# Altium PCB Copy of DAP-PCB.PcbDoc (part 4 of 5)
Units mm, origin at the board's own origin, x right, y up, seen from the top; angles counter-clockwise.
Board outline 63 x 53 mm, 6 copper layers (Top Layer (Sig), L2 (GND), L3 (Sig), L4 (Sig), L5 (GND), Bottom Layer (Sig)), stack 0.87 mm thick; 262 components, 167 nets, 874 pads, 298 vias.
Unrouted connection lines stored in the file: 134.
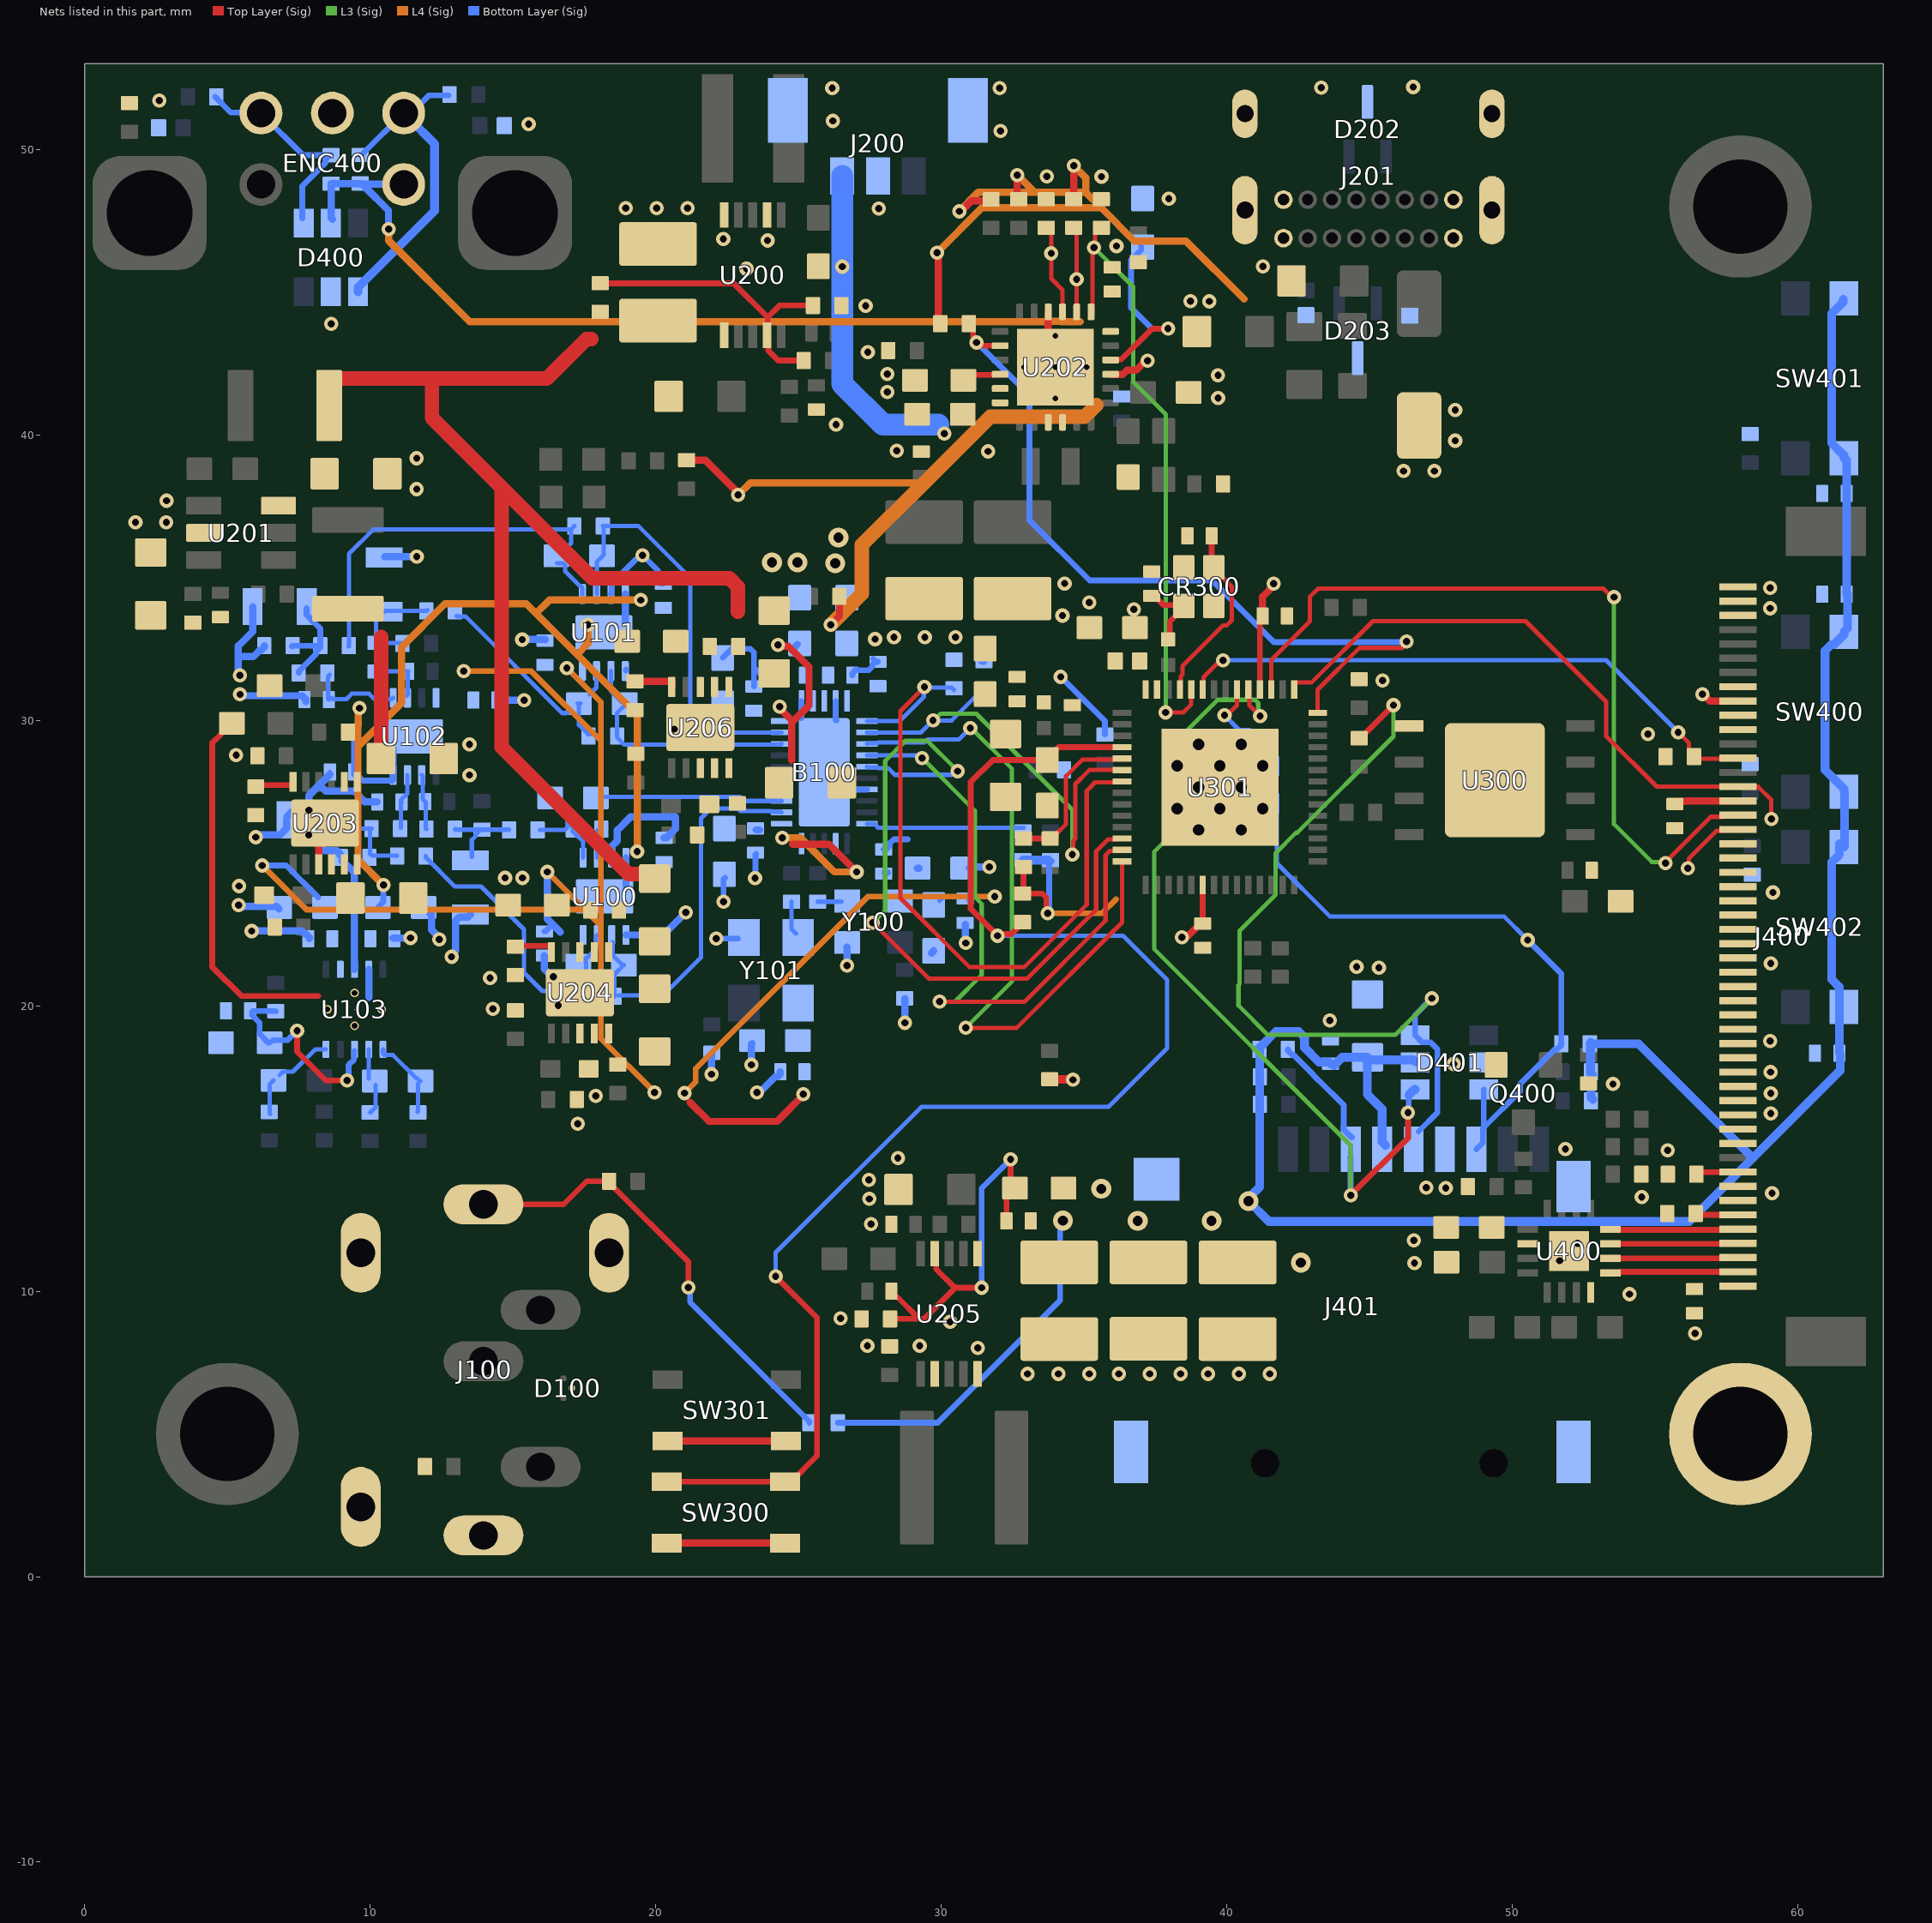
[diagram p6: the nets of this part, all layers, seen from the top]

## Via types
v1: diameter 0.5, hole 0.25, Top Layer (Sig) to Bottom Layer (Sig), tented both sides, 270 vias
v2: diameter 0.7, hole 0.35, Top Layer (Sig) to Bottom Layer (Sig), tented both sides, 17 vias
v3: diameter 1.25, hole 0.75, Top Layer (Sig) to Bottom Layer (Sig), 6 vias
v4: diameter 0.4/0.4/0.4/0.4/0.4/0.4 (per signal layer), hole 0.2, Top Layer (Sig) to Bottom Layer (Sig), tented both sides, 5 vias

## Nets (pads, with @x,y where several pads share a name; then routed paths per layer and width w, separated by ;. In a path a pad name is that pad's centre, name@x,y a point inside that pad or via, vN(x,y) a via of type N, cw(c..) or ccw(c..) an arc to the next point about the centre after c; other vN are vias at no path point) (continued)
GND: (continued)
  other v1: 33.028,7.105 34.108,7.105 35.187,7.105 36.229,7.105 37.308,7.105 38.388,7.105 39.353,7.105 40.432,7.105 41.512,7.105 31.28,8.01 27.419,8.086 29.248,8.086 56.414,8.522 30.315,8.925 26.48,9.052 54.111,9.897 46.583,10.987 51.663,11.069 52.298,11.679 46.558,11.786 27.546,12.354 27.483,13.233 54.54,13.302 46.989,13.629 47.676,13.614 27.47,13.903 28.486,14.665 55.448,14.935 51.867,14.978 17.27,15.871 59.061,16.223 17.907,16.844 59.061,16.934 53.534,17.258 59.055,17.678 47.956,17.962 59.036,18.763 43.612,19.482 14.304,19.887 16.591,20.012 14.2,20.977 45.332,21.332 44.552,21.361 59.061,21.481 21.057,23.266 59.138,23.97 5.406,24.192 14.726,24.481 15.336,24.481 23.482,24.475 5.994,25.908 13.479,28.082 5.309,28.778 13.479,29.161 54.762,29.515 20.65,29.693 15.392,30.709 45.462,31.4 5.436,31.572 27.688,32.846 28.349,32.91 29.429,32.91 30.508,32.91 34.25,33.669 59.036,33.927 35.188,34.134 59.036,34.638 34.328,34.795 11.633,35.738 1.781,36.934 2.86,36.934 2.87,37.694 11.631,38.103 46.195,38.734 47.274,38.734 11.631,39.182 28.448,39.446 48.005,39.797 26.319,40.364 48.005,40.876 39.701,41.293 28.112,41.503 39.7,42.088 28.112,42.138 27.432,42.901 8.636,43.891 27.356,44.526 38.735,44.683 39.395,44.679 23.184,45.821 41.275,45.905 36.144,46.617 23.921,46.812 22.372,46.862 18.957,47.949 20.036,47.949 21.116,47.949 27.813,47.93 37.977,48.279 33.706,49.055 35.617,49.05 32.08,50.648 15.552,50.894 26.213,51.003 2.616,51.714 26.187,52.146 32.055,52.146 43.311,52.165 46.537,52.19
  other v2: 26.293,35.502 24.079,35.535 24.968,35.535 26.401,36.405
  other v4: 34.003,41.275 32.903,42.375 34.003,42.375 35.103,42.375 34.003,43.475
GPIO1_DAC: B100.17 R112.2 U301.6 | length 17
  Top Layer (Sig) w0.152: v1(34.596,25.298) 34.629,25.331 34.629,25.777 34.705,25.853 34.705,27.771 35.193,28.259 U301.6@36.339,28.259
  L3 (Sig) w0.152: v1(29.718,29.997) 29.747,29.997 29.981,30.232 31.232,30.232 34.596,26.868 v1(34.596,25.298)
  Bottom Layer (Sig) w0.152: B100.17@27.408,29.576 29.297,29.576 v1(29.718,29.997) 30.371,29.997 31.438,31.064 R112.2@31.471,31.064
GPIO2_DAC: B100.16 R113.2 U301.7 | length 25.2
  Top Layer (Sig) w0.152: v1@29.362,31.115 28.572,30.325 28.572,23.776 30.986,21.361 32.918,21.361 35.1,23.543 35.1,27.531 35.395,27.825 36.306,27.825 U301.7@36.339,27.859
  Bottom Layer (Sig) w0.152: B100.16@27.408,29.976 28.554,29.976 29.392,30.815 29.392,31.145 v1(29.413,31.166) 29.435,31.144 30.374,31.144 R113.2@30.455,31.064
ILIM_BQ: R217.2 U202.22 | length 6.4
  Top Layer (Sig) w0.203: U202.22@35.938,42.625 35.956,42.643 36.311,42.643 37.389,43.721 v1(37.948,43.721)
  Bottom Layer (Sig) w0.203: R217.2@37.008,46.617 37.008,46.479 36.656,46.127 36.656,44.454 37.389,43.721 v1(37.948,43.721)
ILIM_DAC_LDO+: R246.2 U206.5 | length 1.5
  Top Layer (Sig) w0.254: R246.2@19.279,31.364 20.574,31.364 U206.5@20.574,31.191
ILIM_LDO+: R229.2 U204.5 | length 1.5
  Top Layer (Sig) w0.203: R229.2@15.062,22.098 16.351,22.098 U204.5@16.351,21.88
ILIM_LDO-: R230.2 U203.6 | length 1.4
  Top Layer (Sig) w0.203: R230.2@5.994,27.729 7.274,27.729 7.29,27.745 U203.6@7.29,27.813
IM0: J400.6 R402.2 | length 1.4
  Top Layer (Sig) w0.203: R402.2@56.431,12.725 56.482,12.675 J400.6@57.81,12.675
IM3: J400.9 R403.2 | length 0.9
  Top Layer (Sig) w0.203: R403.2@56.456,14.097 56.532,14.173 J400.9@57.302,14.173
INT_BQ: R210.1 U202.8 U301.42 | length 28.1
  Top Layer (Sig) w0.152: U301.42@43.189,30.259 43.189,31.074 44.653,32.537 46.152,32.537 v1@46.228,32.614
  Top Layer (Sig) w0.203: R210.1@30.972,43.899 31.12,43.75 31.12,43.44 31.242,43.319 v1(31.242,43.238) 31.322,43.238 31.436,43.125 32.041,43.125 U202.8@32.055,43.111
  Bottom Layer (Sig) w0.203: v1(31.242,43.238) 33.096,41.384 33.096,37.008 35.204,34.9 39.497,34.9 41.656,32.741 v1@46.279,32.741
  other v1: 46.304,32.766
ISET_BQ: R218.2 U202.10 | length 1.4
  Top Layer (Sig) w0.203: R218.2@30.783,41.914 30.975,42.106 32.066,42.106 U202.10@32.08,42.121
IV_L: C107.1 R103.2 R116.1 U101.7 | length 7.5
  Bottom Layer (Sig) w0.152: R116.1@13.03,33.655 13.04,33.645 13.335,33.645 16.725,30.255 16.851,30.255 16.862,30.265 C107.1@16.94,30.265 ; C107.1@17.264,30.589 C107.1@17.314,30.589 ; C107.1@17.364,30.589 C107.1@17.314,30.589 ; C107.1@17.688,30.913 17.926,31.15 17.926,31.591 U101.7@17.932,31.598 ; R103.2@17.704,29.515 17.634,29.515 17.314,29.834 C107.1@17.314,30.589
IV_LB: C101.1 R101.2 R123.1 U101.1 | length 13.9
  Bottom Layer (Sig) w0.152: R123.1@9.246,32.588 9.255,32.598 9.255,35.831 10.109,36.685 R101.2@17.034,36.685 ; C101.1@16.547,35.509 16.758,35.509 16.828,35.439 16.828,35.228 17.354,34.702 17.387,34.702 17.436,34.653 U101.1@17.436,34.428 ; C101.1@16.835,36.002 16.835,36.026 16.897,36.087 16.921,36.087 17.034,36.2 R101.2@17.034,36.685 ; R101.2@17.153,36.805 R101.2@17.034,36.685
IV_R: C100.1 R100.2 R121.1 U100.1 | length 3.6
  Bottom Layer (Sig) w0.152: R121.1@15.952,26.163 16.821,26.163 R100.2@16.904,26.246 ; C100.1@16.307,27.28 16.357,27.28 16.928,26.708 16.928,26.404 R100.2@17.12,26.213 ; R100.2@17.094,26.187 17.094,26.105 17.278,25.922 17.301,25.922 17.462,25.761 U100.1@17.462,25.183
IV_RB: C106.1 R102.2 R131.1 U100.7 | length 10.8
  Bottom Layer (Sig) w0.152: R131.1@11.947,25.247 11.947,25.197 12.964,24.181 13.886,24.181 15.391,22.676 15.391,21.159 16.035,20.516 17.385,20.516 17.501,20.401 R102.2@17.501,20.374 ; C106.1@17.475,21.615 17.559,21.531 R102.2@17.559,20.328 ; C106.1@17.551,21.666 17.584,21.666 17.913,21.995 17.913,22.434 U100.7@17.962,22.483
JACK_DET: J100.4 R118.1 R119.2 | length 16.1
  Top Layer (Sig) w0.203: J100.4@13.97,13.044 16.778,13.044 17.588,13.854 R119.2@18.37,13.854 18.37,13.804 21.15,11.024 v1(21.15,10.13)
  Bottom Layer (Sig) w0.203: v1(21.15,10.13) 21.207,10.074 21.207,9.618 25.383,5.442 R118.1@25.383,5.392
LDO_BQ: C214.2 R214.2 U202.24
LED1: J400.2 U400.13 | length 4.4
  Top Layer (Sig) w0.203: U400.13@53.442,10.643 53.465,10.666 53.802,10.666 53.813,10.677 J400.2@57.844,10.677
LED2: J400.3 U400.14 | length 4.4
  Top Layer (Sig) w0.203: U400.14@53.442,11.151 57.361,11.151 57.386,11.176 J400.3@57.81,11.176
LED3: J400.4 U400.15 | length 4.4
  Top Layer (Sig) w0.203: U400.15@53.442,11.659 57.734,11.659 J400.4@57.785,11.709
LED4: J400.5 U400.16 | length 4.5
  Top Layer (Sig) w0.203: U400.16@53.442,12.167 53.462,12.146 57.356,12.146 57.377,12.167 J400.5@57.963,12.167
LEFT_EAR: C138.1 R127.1 U103.7 | length 2.1
  Bottom Layer (Sig) w0.152: U103.7@9.954,18.475 9.954,17.453 C138.1@9.957,17.45 ; R127.1@9.997,16.263 10.011,16.263 10.185,16.437 C138.1@10.185,17.221
MISO_LCD: J400.33 | length 2.1
  Top Layer (Sig) w0.152: v1(56.159,24.816) 56.188,24.845 56.188,25.159 57.162,26.133 57.502,26.133 J400.33@57.556,26.187
MOSI_LCD: J400.34 U301.45 | length 27.8
  Top Layer (Sig) w0.152: U301.45@41.564,31.084 41.564,32.116 42.921,33.472 42.921,34.336 43.205,34.62 53.199,34.62 53.504,34.315 v1(53.569,34.315) ; v1(55.372,24.994) 55.372,25.033 56.959,26.619 J400.34@57.404,26.619
  L3 (Sig) w0.152: v1(53.569,34.315) 53.569,26.365 54.893,25.04 55.325,25.04 v1(55.372,24.994)
NetC118_2: C118.2 R122.2 U102.2 | length 2
  Bottom Layer (Sig) w0.152: U102.2@11.807,28.086 11.848,28.046 11.848,27.231 C118.2@11.926,27.152 ; C118.2@11.913,27.153 11.949,27.116 11.949,26.21 R122.2@11.971,26.187
NetC123_2: C123.2 R120.2 U102.6 | length 2
  Bottom Layer (Sig) w0.152: R120.2@10.211,31.715 C123.2@11.287,31.715 ; U102.6@11.278,30.861 11.321,30.904 11.321,31.71 C123.2@11.335,31.724
NetC124_2: C124.2 R117.1 U103.10 | length 3.2
  Bottom Layer (Sig) w0.152: R117.1@6.502,16.205 6.476,16.231 6.476,17.246 C124.2@6.618,17.388 ; C124.2@6.833,17.577 6.945,17.689 7.296,17.689 8.082,18.475 U103.10@8.454,18.475
NetC127_2: C127.2 R115.1 R116.2 R120.1 | length 3.7
  Bottom Layer (Sig) w0.152: C127.2@10.389,33.782 10.211,33.604 R120.1@10.211,32.715 11.151,32.715 R115.1@11.176,32.69 ; C127.2@10.49,33.807 10.516,33.833 11.989,33.833 R116.2@12.014,33.858
NetC130_2: C130.2 R114.1 R121.2 R122.1 | length 2.9
  Bottom Layer (Sig) w0.152: R122.1@12.971,26.187 12.989,26.17 13.825,26.17 R114.1@13.843,26.187 ; C130.2@13.564,25.222 13.564,25.814 13.695,25.946 13.695,25.996 R114.1@13.869,26.17 ; R114.1@13.919,26.17 14.859,26.17 R121.2@14.867,26.162
NetC131_2: C131.2 R123.2 R124.1 R126.2 | length 3.7
  Bottom Layer (Sig) w0.203: R126.2@7.264,32.588 7.29,32.613 R123.2@8.255,32.613 8.255,33.218 8.036,33.436 8.031,33.436 7.772,33.695 C131.2@7.772,33.934 ; R124.1@7.501,31.665 7.501,31.715 8.106,32.321 8.106,32.415 R123.2@8.254,32.563
NetC132_1: C132.1 R124.2 U102.5 | length 3.3
  Bottom Layer (Sig) w0.152: C132.1@8.553,30.725 8.527,30.751 8.527,31.539 R124.2@8.585,31.598 ; C132.1@8.636,30.785 8.648,30.785 8.689,30.743 9.167,30.743 9.357,30.933 9.963,30.933 10.153,30.743 10.758,30.743 10.801,30.786 U102.5@10.807,30.786
NetC133_2: C133.2 R128.2 R130.2 U103.8 | length 7.1
  Top Layer (Sig) w0.203: v1(7.442,19.126) 7.442,18.39 8.448,17.383 v1(9.19,17.383)
  Bottom Layer (Sig) w0.203: C133.2@5.867,19.685 5.867,19.671 6.129,19.409 6.129,19.008 6.428,18.709 R130.2@6.478,18.709 ; C133.2@5.867,19.787 5.899,19.818 6.686,19.818 R128.2@6.695,19.809 ; R130.2@6.604,18.785 6.616,18.797 7.113,18.797 v1(7.442,19.126) ; v1(9.19,17.383) 9.247,17.44 9.247,17.927 9.435,18.115 9.435,18.401 U103.8@9.449,18.415
NetC136_2: C136.2 R131.2 R132.1 R133.2 | length 3
  Bottom Layer (Sig) w0.152: C136.2@9.068,26.518 9.068,26.397 9.261,26.204 R132.1@10.049,26.204 10.003,26.158 R133.2@10.003,25.319 ; R133.2@10.033,25.298 10.076,25.256 10.939,25.256 R131.2@10.947,25.247
NetC137_1: C137.1 R132.2 U102.3 | length 1.9
  Bottom Layer (Sig) w0.152: R132.2@11.074,26.238 11.074,27.119 C137.1@11.1,27.144 ; C137.1@11.074,27.206 11.307,27.439 U102.3@11.307,28.086
NetC138_2: C138.2 R134.1 U103.6 | length 2.8
  Bottom Layer (Sig) w0.152: U103.6@10.454,18.475 10.454,18.317 10.498,18.273 10.802,18.273 11.625,17.45 C138.2@11.659,17.45 ; R134.1@11.659,16.281 11.673,16.296 11.673,17.274 C138.2@11.762,17.363